# Altium PCB 采集卡.PcbDoc (part 2 of 2)
Units mil, origin at the board's own origin, x right, y up, seen from the top; angles counter-clockwise.
Board outline 5354.33 x 3248.82 mil, 2 copper layers (Top Layer, Bottom Layer); 147 components, 144 nets, 645 pads, 170 vias.
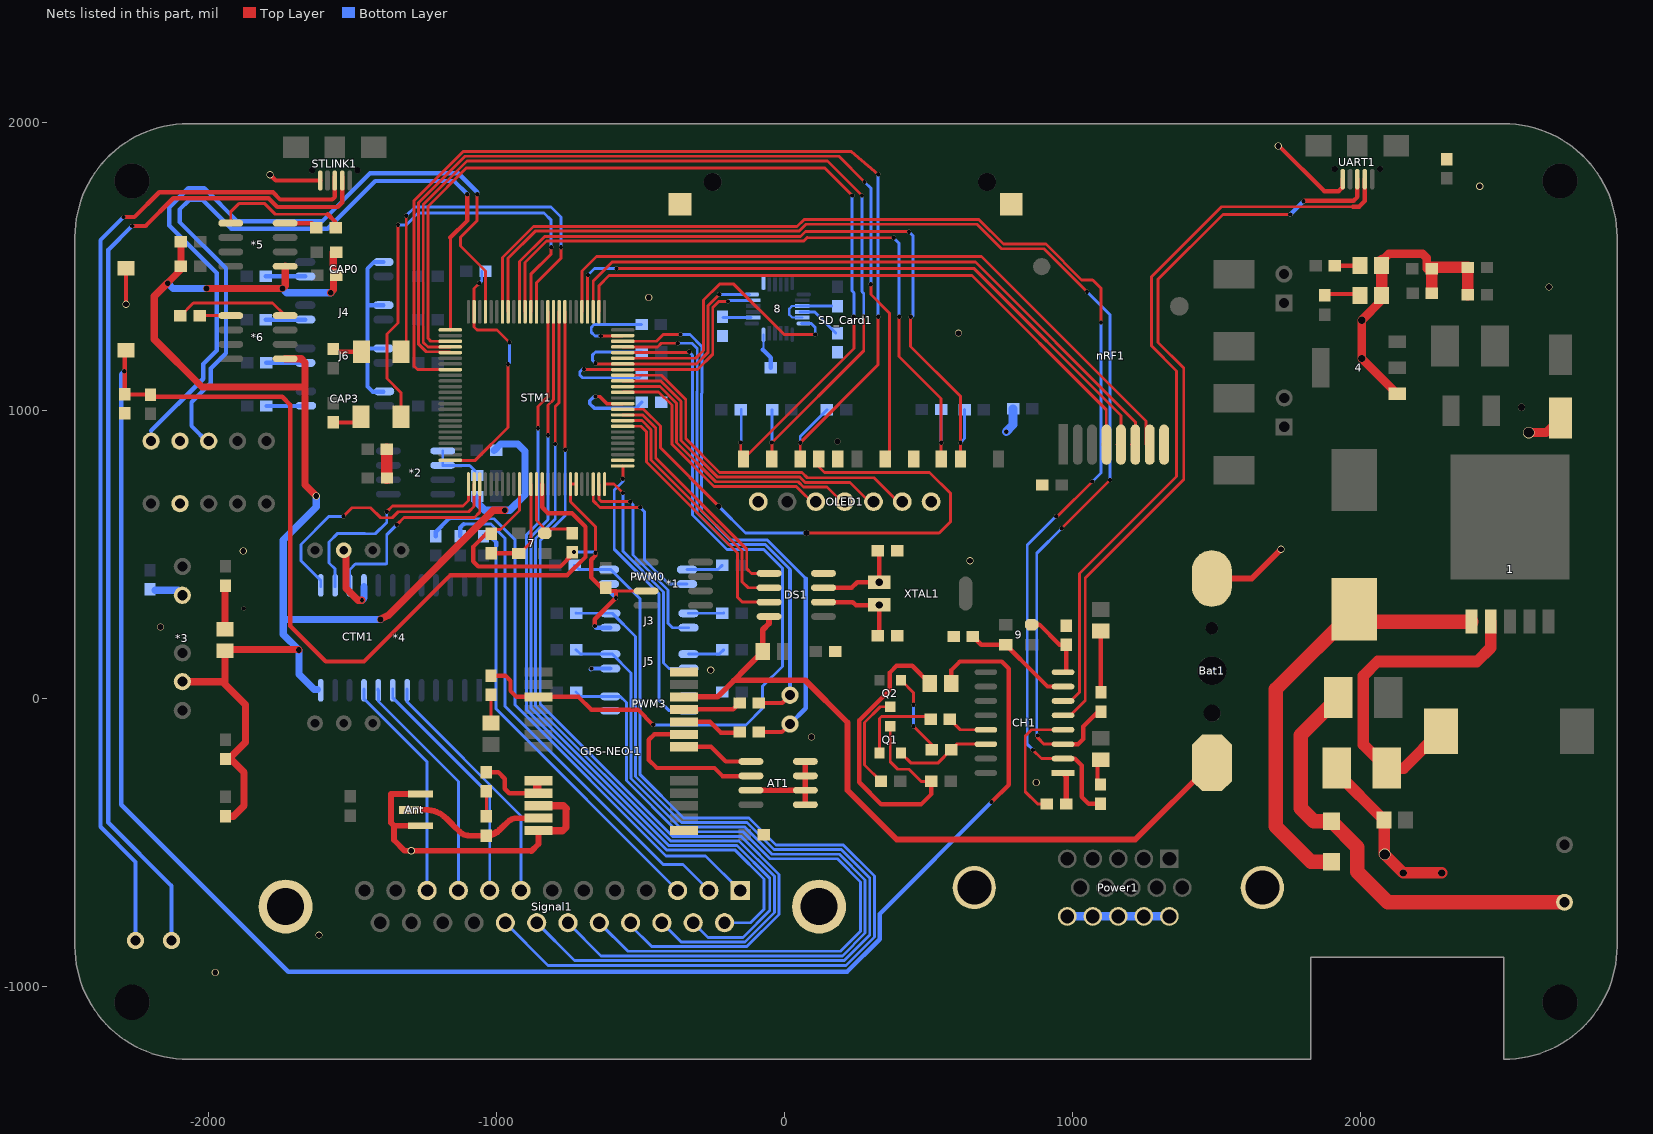
[diagram p2: the nets of this part, all layers, seen from the top]

## Via types
v1: diameter 15, hole 15, Top Layer to Bottom Layer, 109 vias
v2: diameter 20, hole 20, Top Layer to Bottom Layer, 26 vias
v3: diameter 25, hole 20, Top Layer to Bottom Layer, 18 vias
v4: diameter 25, hole 25, Top Layer to Bottom Layer, 14 vias
v5: diameter 40, hole 35, Top Layer to Bottom Layer, 2 vias
v6: diameter 13, hole 13, Top Layer to Bottom Layer, 1 vias

## Nets (pads, with @x,y where several pads share a name; then routed paths per layer and width w, separated by ;. In a path a pad name is that pad's centre, name@x,y a point inside that pad or via, vN(x,y) a via of type N, cw(c..) or ccw(c..) an arc to the next point about the centre after c; other vN are vias at no path point) (continued)
CTR_C: *4.14 STM1.1 | length 787.6
  Top Layer w10: v1(-1380,647) -1360,667 -1115,667 -1096.22,685.78 STM1.1@-1096.22,742.79
  Bottom Layer w10: *4.14@-1559,386.33 *4.14@-1559,391.33 -1559,448 -1580,469 -1580,542 -1550,572 -1457.16,572 -1455.66,570.5 -1419.5,570.5 -1380,610 v1(-1380,647)
CTR_D: *4.13 STM1.2 | length 937.9
  Top Layer w10: v1(-1530,631) -1500,661 -1436,661 -1401,626 -1361,626 -1340,647 -1095,647 -1076.54,665.46 STM1.2@-1076.54,742.79
  Bottom Layer w10: *4.13@-1609,386.33 *4.13@-1609,391.33 -1609,408 -1678,477 -1678,533 -1580,631 v1(-1530,631)
GND: 3.2 3V3.2 4.1 5V.2 8.1 8.9 8.11 8.18 *1.3 *3.2 *4.16 Ant.2 Ant.3 AT1.1 AT1.2 AT1.3 AT1.4 AT1.7 Bat1.2 C1.2 C2.2 C4.2 C5.2 C6.1 C7.2 C8.1 C9.1 C10.1 C11.1 C12.1 C13.2 C14.1 C15.1 C16.1 C17.2 C18.1 C19.1 C20.2 C21.1 C22.2 C23.2 C24.1 C25.2 C26.2 C27.2 C28.2 C30.1 CAP0.3 CAP3.3 CH1.1 CTM1.2 D2.1 DS1.4 GPS-NEO-1.10 GPS-NEO-1.12 GPS-NEO-1.13 GPS-NEO-1.24 J3.3 J4.3 J5.3 J6.3 nRF1.8 OLED1.1 OLED1.7 pad.4 pad.9 Power1.11 Power1.12 Power1.13 Power1.14 Power1.15 Power1.16 Power1.17 PWM0.3 PWM3.3 R9.1 R13.1 R31.1 RST1.1 SD_Card1.3 SD_Card1.6 SD_Card1.12 SD_Card1.13 Signal1.26 Signal1.27 STLINK1.5 STM1.10 STM1.19 STM1.20 STM1.27 STM1.49 STM1.74 STM1.99 UART1.5 | length 9368.5
  Top Layer w10: STM1.99@-1159.21,825.46 -1072.54,825.46 -959,939 v1(-959,1159) ; v1@-1057,1441 -1076.54,1421.46 STM1.74@-1076.54,1341.21 -1076.54,1288.54 -1066,1278 -997,1278 v1(-954,1235) ; C15.1@-1033,570 -1018,585 -985,585 -919.06,650.94 STM1.10@-919.06,742.79 ; C16.1@-746,506 C16.1@-746,521 ; STM1.20@-722.2,742.79 STM1.19@-741.89,742.79 -741.89,681.89 -655,595 v1(-655,505) ; v1(-637,1257) -562.32,1257 STM1.49@-560.79,1258.54 ; -584,372 *1.3@-479.49,372
  Top Layer w15: v3(-2285,1367) RST1.1@-2285,1492 ; C30.1@-1941.97,388.1 C30.1@-1940,390.07 ; v3(-1785,1817) -1765,1797 STLINK1.5@-1611.18,1797 ; C15.1@-1017,570 -1033,570 -1035,570 -1080,525 -1080,475 -1062,457 -777,457 -736,498 C16.1@-736,506 ; v1(-658,250) -658,274 v1(-584,348) -584,372 -608.46,372 C18.1@-620,383.54 ; v1(-655,505) -655,495.3 -670,480.3 -670,418.54 C18.1@-635,383.54 ; v3(1715,1917) 1718,1917 1875,1760 1925,1760 1938.82,1773.82 UART1.5@1938.82,1802
  Top Layer w20: Ant.2@-1262,-443 -1355,-443 ; Ant.3@-1262,-333 -1365,-333 -1365,-433 -1355,-443 ; GPS-NEO-1.12@-853,-460.34 -853,-507 -878,-532 -880,-530 v3(-1295,-530) -1318,-530 -1355,-493 -1355,-443 ; AT1.7@-115.49,-320 AT1.2@73.49,-320 ; AT1.1@73.49,-370 AT1.2@73.49,-320 ; AT1.4@73.49,-220 AT1.3@73.49,-270 AT1.2@73.49,-320 ; CH1.1@968,-260 978.93,-270.93 C20.2@978.93,-368 ; Bat1.2@1485,415 1623,415 v3(1725,517)
  Top Layer w25: R31.1@-1941.97,235.46 C30.1@-1941.97,388.1 ; CTM1.2@-1529,513 -1521,505 -1521,381 -1480,340 v1(-1466,340) ; GPS-NEO-1.12@-853,-460.34 -769.34,-460.34 -758,-449 -758,-386 -756,-384 -766.28,-373.72 GPS-NEO-1.10@-853,-373.72
  Top Layer w30: 3V3.2@2074,1398 2074,1381 v4(2005,1312) v4(2005,1179.32) 4.1@2127.87,1056.45 ; 5V.2@2075,1518.59 2099.41,1543 2216,1543 2231,1528 C12.1@2231,1490 ; v5(2585,922) 2645,922 C4.2@2695,972
  Top Layer w40: R13.1@-1379.07,864 -1379.07,764.07 C19.1@-1379,764 ; D2.1@1918.39,-243 1918.39,-258.79 3.2@2082.6,-423 2082.6,-540.6 v5(2085,-543) v4(2149,-607) v4(2283,-607) ; 3V3.2@2074,1398 5V.2@2074,1502.59 2074,1517.59 5V.2@2075,1518.59 ; C12.1@2248,1490 2248,1406 C13.2@2249,1405 ; C12.1@2248,1495 C11.1@2373.07,1495 C10.1@2373.07,1400
  Bottom Layer w8: -73.96,1209.04 -72,1211 8.18@-72,1261 ; 8.9@55,1361 27,1361 18,1352 18,1331 28,1321 8.11@63,1321
  Bottom Layer w10: v1(-1059,1440) -1050,1449 C24.1@-1050,1482 ; v1(-959,1159) -954,1164 v1(-954,1235) ; v1(-730,507) -657,507 v1(-655,505) ; v1(-637,1257) -656.93,1257 -670,1270.07 -670,1287 -660,1297 C21.1@-495,1297 ; 8.9@55,1361 164.93,1361
  Bottom Layer w15: -1446,1364 J4.3@-1391.25,1364 ; CAP3.3@-1391.25,1064 -1429,1064 -1447,1082 -1447,1214 ; J6.3@-1391.25,1214 -1447,1214 ; CAP0.3@-1391.25,1514 -1424,1514 -1447,1491 -1447,1214 ; v1@-672,100 v1(-669.33,102.67) J5.3@-603.75,102.67 ; v1(-658,250) -652.33,244.33 J3.3@-603.75,244.33 ; PWM0.3@-608.75,396 -608.75,372.75 v1(-584,348) ; -73.96,1209.04 -46.93,1182 C25.2@-46.93,1147
  Bottom Layer w25: C1.2@-2185,374.54 -2102.54,374.54 *3.2@-2085,357 ; v1(-1466,340) -1459,347 *4.16@-1459,386.33
  Bottom Layer w30: v1(771,925) 794.54,948.54 C2.2@794.54,1003.94 ; Power1.15@982.84,-758 Power1.14@1071.42,-758 Power1.13@1160,-758 Power1.12@1248.58,-758 Power1.11@1337.16,-758
  other v1: -1876,311
  other v2: 185.48,891
  other v3: -1975,-953 -1615,-823 875,-293 95,-135 -255,97 -2165,247 645,477 -1878,511 605,1267 -470,1391 2655,1427 2415,1777
  other v4: 2560,1010
INH: *4.15 STM1.3 | length 749.9
  Top Layer w10: v1(-1345,602) -1320,627 -1075,627 -1056.85,645.15 STM1.3@-1056.85,742.79
  Bottom Layer w10: *4.15@-1509,386.33 *4.15@-1509,391.33 -1509,445 -1489,465 -1382,465 -1380,467 -1380,567 v1(-1345,602)
INT: 8.12 STM1.45 | length 1034.1
  Top Layer w10: STM1.45@-560.79,1179.8 -307.2,1179.8 -280,1207 -280,1382 -225,1437 -175,1437 0,1262 100,1262
  Bottom Layer w10: 8.12@60,1301 8.12@86,1301 ; 8.12@73,1301 94,1301 108,1287 v1(108,1262)
IO0: Signal1.17 STM1.58 | length 3216.9
  Top Layer w10: STM1.58@-761.57,1341.21 -761.57,861.35 -760.19,859.96 v1(-760.19,861.81)
  Bottom Layer w10: v1(-760.19,861.81) -760.19,633.93 -847,547.12 -847,-20.49 -387.49,-480 -150.12,-480 -18,-612.12 -18,-751.25 -129.75,-863 -460,-863 -533.25,-789.75 Signal1.17@-533.25,-779.89
IO1: Signal1.16 STM1.59 | length 3062.9
  Top Layer w10: v1(-795,882) -795,1012 -781.26,1025.74 STM1.59@-781.26,1341.21
  Bottom Layer w10: v1(-795,882) -795,621.75 -863,553.75 -863,-27.12 -394.12,-496 -156.75,-496 -34,-618.75 -34,-744.63 -136.37,-847 -357.44,-847 Signal1.16@-424.55,-779.89
IO2: Signal1.15 STM1.60 | length 2919.5
  Top Layer w10: v1(-820,912) -820,1017 -800.94,1036.06 STM1.60@-800.94,1341.21
  Bottom Layer w10: v1(-820,912) -820,619.37 -879,560.37 -879,-33.75 -400.75,-512 -163.37,-512 -50,-625.37 -50,-738 -143,-831 -264.74,-831 Signal1.15@-315.85,-779.89
IO3: Signal1.14 STM1.61 | length 2742.4
  Top Layer w10: v1(-855,937) -855,1012 -820.63,1046.37 STM1.61@-820.63,1341.21
  Bottom Layer w10: v1(-855,937) -855,607 -895,567 -895,-40.37 -407.37,-528 -170,-528 -70,-628 -70,-733 -116.89,-779.89 Signal1.14@-207.15,-779.89
IRQ: nRF1.7 STM1.55 | length 2439.2
  Top Layer w10: STM1.55@-702.52,1341.21 -702.52,1482.48 -652,1533 685,1533 1256,962 nRF1.7@1256,880
LED1: LED1.2 STM1.64 | length 1608
  Top Layer w10: v1(-1341,1643) -1341,1302 -1379,1264 -1379,1109 -1331,1061 LED1.2@-1331,977 ; STM1.64@-879.69,1341.21 -879.69,1471.31 -809,1542 v1(-809,1565)
  Bottom Layer w10: v1(-1341,1643) -1312,1643 -1271,1684 -834,1684 -809,1659 v1(-809,1565)
LED2: LED2.2 STM1.63 | length 1408.4
  Top Layer w10: LED2.2@-1330,1202 -1312,1220 v1(-1312,1675) ; STM1.63@-860,1341.21 -860,1442 -775,1527 v1(-775,1565)
  Bottom Layer w10: v1(-1312,1675) -1282,1705 -810,1705 -775,1670 v1(-775,1565)
MISO: nRF1.6 STM1.53 | length 2330.5
  Top Layer w10: STM1.53@-663.15,1341.21 -663.15,1447.85 -597,1514 664,1514 1219,959 1219,893 nRF1.6@1206,880
MOSI: nRF1.5 STM1.54 | length 2306.1
  Top Layer w10: STM1.54@-682.83,1341.21 -682.83,1467.17 v1(-681,1469) ; v1(-582,1491) -581,1492 658,1492 1169,981 1169,893 nRF1.5@1156,880
  Bottom Layer w10: v1(-681,1469) -659,1491 v1(-582,1491)
Net1_1: 1.1 C3.1 D1.2 | length 1536.9
  Top Layer w50: D1.2@1900,-568 1829,-568 1706,-445 1706,30 1989,313 2036.34,265.66 1.1@2386.14,265.66
Net1_2: 1.2 D2.2 L1.1 | length 1169.3
  Top Layer w40: L1.1@2279.78,-115 2151.78,-243 D2.2@2091.61,-243 2010,-161.39 2010,77 2060,127 2405,127 2453.07,175.07 1.2@2453.07,265.66
Net2_1: 12V.1 D1.1 D3.2 | length 1539.8
  Top Layer w50: D3.2@1923.39,2 1793,-128.39 1793,-383 1838,-428 D1.1@1900,-428 1990,-518 1990,-603 2096,-709 12V.1@2709,-709
Net5_1: 5V.1 R11.1 | length 71.1
  Top Layer w15: R11.1@1911.6,1501.06 5V.1@1982.67,1501.06
Net6_1: 3V3.1 R12.1 | length 109.3
  Top Layer w15: R12.1@1877,1403 1979.2,1403 3V3.1@1984.2,1398
Net7_1: 7.1 C16.2 STM1.13 | length 253.2
  Top Layer w10: STM1.13@-860,742.79 -860,616 -831,587 -746.93,587 C16.2@-746,587.93
Net7_3: 7.3 C15.2 STM1.12 | length 333.4
  Top Layer w10: C15.2@-1007,518.07 C15.2@-1005.93,517 ; 7.3@-903,517 -879.69,540.32 STM1.12@-879.69,742.79
  Top Layer w15: C15.2@-1017,503.07 -922.07,503.07 7.3@-921,502
Net8_10: 8.10 C26.1 | length 154.7
  Bottom Layer w10: 8.10@55,1341 105,1341 C26.1@179,1267
Net8_20: 8.20 C17.1 | length 98
  Bottom Layer w10: C17.1@-213,1321 8.20@-115,1321
Net9_1: 9.1 C27.1 CH1.8 | length 244
  Top Layer w15: 9.1@859,255 886,255 956,185 C27.1@979,185 CH1.8@979,90
Net9_3: 9.3 C23.1 CH1.7 | length 385.1
  Top Layer w15: C23.1@655,214 684,185 9.3@769,185 874,80 914,40 CH1.7@968,40
Net*2_1: *2.1 *2.2 R29.1 | length 170.4
  Bottom Layer w10: *2.1@-1185.51,858 *2.2@-1185.51,808 -1092,808 R29.1@-1073,789
Net*5_1: *5.1 R40.1 | length 445.1
  Top Layer w10: *5.1@-1921.49,1649 -1921.49,1688.51 -1893.5,1716.5 -1803.5,1716.5 -1767,1680 -1585,1680
  Top Layer w15: -1585,1680 -1557.54,1652.54 R40.1@-1557.54,1649
Net*5_8: *5.8 R40.2 | length 114.7
  Top Layer w15: *5.8@-1732.51,1649 -1640.46,1649 R40.2@-1624.46,1633
Net*6_1: *6.1 R52.1 | length 107
  Top Layer w10: R52.1@-2028.54,1328 *6.1@-1921.49,1328
Net*6_8: *6.8 R52.2 | length 400.8
  Top Layer w10: R52.2@-2096.46,1327 -2051.46,1372 -1776.51,1372 *6.8@-1732.51,1328
NetAntenna1_1: Ant.1 GPS-NEO-1.11 L2.2 | length 776.2
  Top Layer w10: L2.2@-1049,-477.75 ccw(c-1043.69,-377.89) L2.2@-1043.69,-477.89
  Top Layer w15: -1177.71,-417.29 -1146.4,-448.6 ccw(c-1075.69,-377.89) -1127.61,-463.36 ; L2.2@-1049,-477.75 ccw(c-1054.31,-377.89) -983.6,-448.6 -981.32,-446.32 cw(c-910.61,-517.03) -958.71,-429.36 cw(c-910.61,-517.03) -910.61,-417.03 GPS-NEO-1.11@-873,-417.03
  Top Layer w20: Ant.1@-1302,-388 -1244.39,-388 cw(c-1244.39,-488) -1173.68,-417.29 -1127.61,-463.36 ccw(c-1092.52,-428.26) -1092.52,-477.89 L2.2@-1034,-477.89 ; L2.2@-1043.69,-477.89 L2.2@-1034,-477.89 ; GPS-NEO-1.11@-853,-417.03 -910.61,-417.03 -928.95,-417.03 ccw(c-928.95,-459.12) -958.71,-429.36 -988.32,-458.97 cw(c-1034,-413.29) L2.2@-1034,-477.89
NetAT1_5: AT1.5 GPS-NEO-1.18 | length 280.7
  Top Layer w10: GPS-NEO-1.18@-378,-169 GPS-NEO-1.18@-373,-174
  Top Layer w15: GPS-NEO-1.18@-368,-169 -254,-169 -230,-193 -203,-220 AT1.5@-115.49,-220
NetAT1_6: AT1.6 GPS-NEO-1.19 | length 558.1
  Top Layer w15: GPS-NEO-1.19@-368,-125.69 -450.69,-125.69 -470,-145 -470,-215 -442,-243 -242,-243 -214,-271 -116.49,-271 AT1.6@-115.49,-270
NetC6_2: C6.2 DS1.2 XTAL1.1 | length 307.4
  Top Layer w15: DS1.2@136.49,333 238,333 249,322 328.37,322 XTAL1.1@330,323.63 330,221.93 C6.2@325.07,217
NetC14_2: C14.2 DS1.3 XTAL1.2 | length 312.2
  Top Layer w15: DS1.3@136.49,383 234,383 253.37,402.37 XTAL1.2@330,402.37 330,506.07 C14.2@325.07,511
NetC20_1: C20.1 CH1.4 | length 425.9
  Top Layer w10: C20.1@912,-368 880,-368 837,-325 837,-132 859,-110 CH1.4@968,-110
NetCH1_13: CH1.13 R20.2 | length 140.3
  Top Layer w10: R20.2@574.93,-74 610.93,-110 CH1.13@700.28,-110
NetCH1_14: CH1.14 Q1.2 R21.2 | length 337
  Top Layer w10: Q1.2@405.4,-190.26 441.14,-226 532.93,-226 R21.2@579.93,-179 598.93,-160 CH1.14@700.28,-160
NetD5_2: D5.2 Q1.3 R15.2 | length 1385.2
  Top Layer w10: 263,-78.37 367,25.63 367,29.16 ; Q1.3@368,-97.74 368,-221 394,-247 433,-247 475,-289 R15.2@511.07,-289
  Top Layer w15: D5.2@505.6,51 444.6,112 390,112 367,89 367,29.16 260.5,-77.34 260.5,-292.5 337,-369 475,-369 511.07,-332.93 R15.2@511.07,-289
NetGPS-NEO-1_8: GPS-NEO-1.8 GPS-NEO-1.9 R18.2 | length 270.2
  Top Layer w15: R18.2@-1034,-257.07 -992.93,-257.07 -970,-280 -970,-315 -954.58,-330.42 -873,-330.42 GPS-NEO-1.9@-858,-330.42
  Top Layer w30: GPS-NEO-1.9@-858,-330.42 GPS-NEO-1.8@-858,-287.11
NetGPS-NEO-1_20: GPS-NEO-1.20 R22.1 | length 239.4
  Top Layer w10: GPS-NEO-1.20@-378,-82.39 GPS-NEO-1.20@-368,-82.39
  Top Layer w15: GPS-NEO-1.20@-368,-82.39 -257.61,-82.39 -220,-120 -157,-120 R22.1@-155,-118
NetGPS-NEO-1_21: GPS-NEO-1.21 R23.1 | length 212.1
  Top Layer w10: GPS-NEO-1.21@-378,-39.08 GPS-NEO-1.21@-368,-39.08
  Top Layer w15: GPS-NEO-1.21@-348,-39.08 -177.08,-39.08 R23.1@-155,-17
NetJ1_1: PWM0.1 R33.2 | length 128.6
  Bottom Layer w10: PWM0.1@-337.25,446 -230.28,446 R33.2@-215,461.28
NetJ2_1: CAP0.1 R34.2 | length 136.8
  Bottom Layer w15: R34.2@-1799.54,1464 CAP0.1@-1662.75,1464
NetJ3_1: J3.1 R37.2 | length 122.5
  Bottom Layer w10: J3.1@-332.25,294.33 -210.67,294.33 R37.2@-210,295
NetJ4_1: J4.1 R38.2 | length 136.8
  Bottom Layer w15: R38.2@-1799.54,1314 J4.1@-1662.75,1314
NetJ5_1: J5.1 R42.2 | length 128.6
  Bottom Layer w10: J5.1@-332.25,152.67 -225.28,152.67 R42.2@-210,167.94
NetJ6_1: J6.1 R43.2 | length 135.3
  Bottom Layer w15: R43.2@-1798.07,1164 J6.1@-1662.75,1164
NetJ7_1: PWM3.1 R49.2 | length 128.6
  Bottom Layer w10: PWM3.1@-332.25,6 -225.28,6 R49.2@-210,21.28
NetJ8_1: CAP3.1 R50.2 | length 137.2
  Bottom Layer w15: R50.2@-1797.54,1014 -1661.75,1014 CAP3.1@-1660.75,1015
NetL2_1: L2.1 R18.1 | length 87
  Top Layer w10: L2.1@-1034,-410.96 R18.1@-1034,-324
NetLED1_1: LED1.1 R26.1 | length 93.3
  Top Layer w15: R26.1@-1553.8,957 -1488.8,957 LED1.1@-1468.8,977
NetLED2_1: LED2.1 R27.1 | length 86
  Top Layer w15: R27.1@-1553.8,1202 LED2.1@-1467.8,1202
NetPCC1_2: PCC1.2 R24.1 | length 97.6
  Top Layer w10: PCC1.2@-1018,-86.6 R24.1@-1018,11
NetQ1_1: Q1.1 R20.1 | length 303.5
  Top Layer w10: Q1.1@330.6,-190.26 330.6,-71.4 338,-64 498,-64 R20.1@508,-74
NetQ2_1: Q2.1 R21.1 | length 285.8
  Top Layer w10: Q2.1@405.4,62.26 449,18.66 v1(449,-23) ; v1(449,-98) 513,-162 R21.1@513,-179
  Bottom Layer w10: v1(449,-98) v1(449,-23)
NetQ2_3: Q2.3 R25.2 | length 339.3
  Top Layer w10: R25.2@336.07,-289 279,-231.93 279,-85 333.74,-30.26 Q2.3@368,-30.26
NetR9_2: R9.2 STM1.37 | length 336
  Top Layer w12: v1(-655,1047) -640,1047 -615.31,1022.31 STM1.37@-560.79,1022.31
  Bottom Layer w12: v1(-655,1047) -660,1047 -675,1032 -675,1022 -660,1007 -514.15,1007 R9.2@-494.15,1027
NetR14_2: R14.2 RX1.2 | length 92.4
  Top Layer w10: R14.2@1088,-300 R14.2@1089.53,-298.47
  Top Layer w15: R14.2@1088,-300 1088,-225.33 RX1.2@1099,-214.33
NetR16_2: R16.2 TX1.2 | length 216.3
  Top Layer w15: R16.2@1090,20 1099,29 TX1.2@1099,232.6
NetR45_1: R45.1 Signal1.3 | length 1523.5
  Bottom Layer w10: -1000,530 -1000,-38.28 Signal1.3@-370.2,-668.08
  Bottom Layer w15: R45.1@-1044,562 -1021,562 -999,540 -1000,539 -1000,530
NetR46_1: R46.1 Signal1.2 | length 1767.5
  Bottom Layer w10: -1113,604 -1018,604 -970,556 -970,-28 -420,-578 -351.57,-578 Signal1.2@-261.5,-668.08
  Bottom Layer w15: R46.1@-1125,562 -1125,592 -1113,604
NetR47_1: R47.1 Signal1.1 | length 1961.3
  Bottom Layer w10: -1165,622 -1164.5,622.5 -1007.5,622.5 -935,550 -935,-23 -410,-548 -272.87,-548 Signal1.1@-152.8,-668.08
  Bottom Layer w15: R47.1@-1210,562 -1210,577 -1165,622
OLED_D0: OLED1.3 STM1.39 | length 913.2
  Top Layer w10: STM1.39@-559.47,1063 -436,1063 -390,1017 -390,881 -244,735 42,735 OLED1.3@110,667
OLED_D1: OLED1.4 STM1.40 | length 1020
  Top Layer w10: STM1.40@-560.79,1081.37 -431.74,1081.37 -374,1023.63 -374,887.63 -237.37,751 48.63,751 66.63,733 149,733 OLED1.4@210,672
OLED_DS: OLED1.6 STM1.42 | length 1238.4
  Top Layer w10: STM1.42@-560.79,1120.74 -425.86,1120.74 -342,1036.88 -342,900.88 -224.12,783 61.88,783 79.88,765 312,765 OLED1.6@410,667
OLED_RST: OLED1.5 STM1.41 | length 1130.2
  Top Layer w10: STM1.41@-560.79,1101.06 -428.8,1101.06 -358,1030.25 -358,894.25 -230.75,767 55.25,767 73.25,749 228,749 OLED1.5@310,667
PCCGPS: GPS-NEO-1.3 R24.2 STM1.46 | length 2765.5
  Top Layer w10: STM1.46@-560.79,1199.48 -332.52,1199.48 v1(-330,1202)
  Top Layer w15: R24.2@-1018,77.93 -967.93,77.93 -950,60 -950,25 -929.23,4.23 GPS-NEO-1.3@-853,4.23 -714.23,4.23 -670,-40 -508,-40 v1(-455,-93)
  Bottom Layer w10: v1(-455,-93) -133,-93 -75,-35 -75,41 -6,110 -6,451 -71,516 -199,516 -318.75,635.75 -318.75,1071.2 -318,1071.95 -318,1190 v1(-330,1202)
PWM0: PWM0.2 STM1.23 | length 601.2
  Top Layer w10: STM1.23@-663.15,742.79 -663.15,685.15 -640,662 v1(-500,662)
  Bottom Layer w10: v1(-500,662) -485,647 -485,479.88 -401.12,396 PWM0.2@-337.25,396
PWM1: J3.2 STM1.24 | length 718.2
  Top Layer w10: STM1.24@-643.46,742.79 -643.46,690.46 -635,682 v1(-535,682)
  Bottom Layer w10: v1(-535,682) -525,672 -525,497.25 -403,375.25 -403,260 -387.33,244.33 J3.2@-332.25,244.33
PWM2: J5.2 STM1.25 | length 819.7
  Top Layer w10: STM1.25@-623.78,742.79 -590.79,742.79 v1(-560,712)
  Bottom Layer w10: v1(-560,712) -560,509.63 -419,368.63 -419,122 -399.67,102.67 J5.2@-332.25,102.67
PWM3: PWM3.2 STM1.26 | length 1008.4
  Top Layer w10: STM1.26@-560.79,805.78 -560,804.99 v1(-560,762)
  Bottom Layer w10: v1(-560,762) -560,752 -590,722 -590,517 -435,362 -435,-8 -399,-44 PWM3.2@-332.25,-44
PWM_O0: PWM0.4 R32.2 Signal1.21 | length 3439.5
  Bottom Layer w10: Signal1.21@-968.05,-779.89 -819.94,-928 214.35,-928 313,-829.35 313,-618.12 204.88,-510 -28.37,-510 -122.37,-416 -350.12,-416 -500,-266.12 -500,343.95 -602.05,446 PWM0.4@-608.75,446 -712.26,446 R32.2@-727.54,461.28
PWM_O1: J3.4 R36.2 Signal1.20 | length 3130.4
  Bottom Layer w10: Signal1.20@-859.35,-779.89 -728.24,-911 208.72,-911 297,-822.72 297,-624.75 198.25,-526 -35,-526 -129,-432 -356.75,-432 -516,-272.75 -516,213.28 -597.05,294.33 J3.4@-603.75,294.33 -721.87,294.33 R36.2@-722.54,295
PWM_O2: J5.4 R41.2 Signal1.19 | length 2846.3
  Bottom Layer w10: Signal1.19@-750.65,-779.89 -635.54,-895 202.09,-895 281,-816.09 281,-631.37 191.63,-542 -42.86,-542 -136.86,-448 -363.37,-448 -532,-279.37 -532,87.62 -597.05,152.67 J5.4@-603.75,152.67 -707.26,152.67 R41.2@-722.54,167.94
PWM_O3: PWM3.4 R48.2 Signal1.18 | length 2567.6
  Bottom Layer w10: R48.2@-722.54,21.28 -707.26,6 PWM3.4@-603.75,6 -569,6 -548,-15 -548,-286 -370,-464 -143.49,-464 -49.49,-558 185,-558 265,-638 265,-809.46 195.46,-879 -542.84,-879 Signal1.18@-641.95,-779.89
RST: C5.1 D5.1 R1.2 RST1.2 STM1.14 | length 8925.6
  Top Layer w15: RST1.2@-2285,1207 -2290,1202 C5.1@-2290,1055.46 -2288.46,1053.93 R1.2@-2200,1053.93 -2192.07,1046 -1743,1046 -1715,1018 -1715,250 -1592,127 -1459,127 -1159,427 -753,427 -690,490 -690,595 -737,642 -820,642 -840.31,662.32 STM1.14@-840.31,742.79 ; D5.1@580.4,51 580.4,97.4 610,127 755,127 780,102 780,-301 v1(720,-361)
  Bottom Layer w15: v1(-2291,1135) -2302,1124 -2302,-370 -1722,-950 218.51,-950 331.5,-837.01 331.5,-749.5 v1(720,-361)
RTC_CLK: DS1.7 STM1.33 | length 912.8
  Top Layer w10: STM1.33@-560.79,943.57 -496.83,943.57 -478,924.75 -478,819.75 -162,503.75 -162,350 -145,333 DS1.7@-52.49,333
RTC_IO: DS1.6 STM1.34 | length 872.5
  Top Layer w10: STM1.34@-560.79,963.26 -493.89,963.26 -462,931.37 -462,826.37 -146,510.37 -146,404 -125,383 DS1.6@-52.49,383
RTC_RST: DS1.5 STM1.35 | length 838.4
  Top Layer w10: STM1.35@-560.79,982.94 -490.94,982.94 -446,938 -446,833 -130,517 -130,449 -114,433 DS1.5@-52.49,433 ; DS1.5@-52.49,432 DS1.5@-51.49,432
RX1: CH1.2 R14.1 STM1.69 | length 4505.7
  Top Layer w10: STM1.69@-978.11,1341.21 -978.11,1529.77 -870.88,1637 44.75,1637 68.75,1661 676.25,1661 761.25,1576 908.63,1576 1032.63,1452 1071,1452 1100,1423 v1(1100,1304) ; v1(863,-180) 893,-210 CH1.2@968,-210 ; v1(944,631) 949,631 v1(1070,752)
  Top Layer w15: CH1.2@968,-210 1009,-210 1033,-234 1033,-343 1056.93,-366.93 R14.1@1088,-366.93
  Bottom Layer w10: v1(863,-180) 863,-179 844,-160 844,531 v1(944,631) ; v1(1070,752) 1100,782 v1(1100,1304)
RX3GPS: pad.1@20,-90 R22.2 STM1.48 | length 1996.2
  Top Layer w10: STM1.48@-560.79,1238.85 -443.15,1238.85 -420,1262 v1(-360,1262)
  Top Layer w15: R22.2@-88.07,-118 -8,-118 pad.1@20,-90
  Bottom Layer w10: v1(-360,1262) -327.37,1262 -286,1220.63 -286,1058.7 -286.75,1057.95 -286.75,649 -187.25,549.5 -59.25,549.5 75,415.25 ; pad.1@0,-90 8,-90 pad.1@14,-84
  Bottom Layer w15: pad.1@20,-90 75,-35 75,415.25
SCK: nRF1.4 STM1.52 | length 2185.5
  Top Layer w10: STM1.52@-643.46,1341.21 -643.46,1431.54 -608,1467 652,1467 1118,1001 1118,892 nRF1.4@1106,880
SCL: 8.23 R17.2 STM1.43 | length 1028.8
  Top Layer w10: v1(-695,1142) -693.43,1140.43 STM1.43@-560.79,1140.43 -301.32,1140.43 -248,1193.75 -248,1356.37 -227.37,1377 v1(-195,1377)
  Bottom Layer w10: v1(-695,1142) -700,1142 -710,1132 -710,1122 -700,1112 -504.15,1112 R17.2@-494.15,1122 ; v1(-195,1377) -191,1381 8.23@-115,1381
SD_CD: SD_Card1.10 STM1.36 | length 1997.9
  Top Layer w10: STM1.36@-560.79,1002.63 -488,1002.63 -430,944.63 -430,869 v2(-227,666) ; v2(77,573) 538,573 578,613 578,710 505,783 140,783 120.52,802.48 SD_Card1.10@120.52,830
  Bottom Layer w10: v2(-227,666) -134,573 v2(77,573)
SD_CLK: SD_Card1.5 STM1.80 | length 3268.4
  Top Layer w10: STM1.80@-1159.21,1199.48 -1161.99,1202.26 -1242.89,1202.26 -1269,1228.37 -1269,1720.25 -1108.25,1881 190,1881 v1(279,1792) ; v1(301,1437) 301,1401 365,1337 365,843.77 SD_Card1.5@351.23,830
  Bottom Layer w10: v1(279,1792) 301,1770 v1(301,1437)
SD_CMD: R5.2 SD_Card1.2 STM1.83 | length 3669.1
  Top Layer w10: STM1.83@-1159.21,1140.43 -1273.43,1140.43 -1285,1152 -1285,1726.88 -1114.88,1897 233,1897 v1(326,1819) ; SD_Card1.2@55.56,830 v1(55.56,886.56) 326,1157 v1(326,1324)
  Bottom Layer w10: v1(55.56,886.56) 55.56,908.49 R5.2@148.07,1001 ; v1(326,1324) v1(326,1819)
SD_D0: R6.2 SD_Card1.7 STM1.65 | length 2438.7
  Top Layer w10: STM1.65@-899.37,1341.21 -899.37,1512.63 -825,1587 68,1587 80,1599 81,1598 v1(380,1598) ; v1(399,1324) 399,1186 544.93,1040.07 v1(544.93,886.56) SD_Card1.7@544.93,830
  Bottom Layer w10: v1(380,1598) 399,1579 v1(399,1324) ; v1(544.93,886.56) R6.2@544.93,1002
SD_D1: R7.2 SD_Card1.8 STM1.66 | length 2565.2
  Top Layer w10: STM1.66@-919.06,1341.21 -919.06,1515.57 -831.63,1603 57,1603 74,1620 v1@433,1620 ; v1(439,1324) 439,1221 611.86,1048.14 v1(611.86,886.56) SD_Card1.8@611.86,830
  Bottom Layer w10: v1(433,1619) 447,1605 447,1327 v1@439,1319 ; v1(611.86,886.56) 626.07,900.77 R7.2@626.07,1001.5
SD_D2: R3.2 SD_Card1.9 STM1.78 | length 3353.7
  Top Layer w10: STM1.78@-1159.21,1238.85 -1226.85,1238.85 -1237,1249 -1237,1707 -1104,1840 141,1840 v1(236,1745) ; v1(-151,887.13) -151,839.71 SD_Card1.9@-141.29,830 242,1213.29 v1(242,1325)
  Bottom Layer w10: v1@-149.07,887.13 R3.2@-149.07,1002 ; v1@236,1739 236,1413 242,1407 v1(242,1325)
SD_D3: R4.2 SD_Card1.1 STM1.79 | length 3376.9
  Top Layer w10: STM1.79@-1159.21,1219.17 -1237.17,1219.17 -1253,1235 -1253,1713.63 -1101.63,1865 150,1865 v1(270,1745) ; SD_Card1.1@-42.87,830 v1(-42.87,887.13) 276,1206 v1(276,1325)
  Bottom Layer w10: v1@-41.93,888.07 R4.2@-41.93,1001 ; v1(270,1745) 270,1411 276,1405 v1(276,1325)
SDA: 8.24 R19.2 STM1.44 | length 940.8
  Top Layer w10: v1(-655,1162) -653.11,1160.11 STM1.44@-560.79,1160.11 -304.26,1160.11 -264,1200.37 -264,1363 v1(-225,1402)
  Bottom Layer w10: v1(-655,1162) -665,1172 -665,1192 -655,1202 R19.2@-494.15,1202 ; v1(-225,1402) -224,1401 8.24@-120,1401
SGND: *3.5 *4.12 *5.5 *6.5 C29.1 C31.2 C32.1 C33.1 C34.1 C35.1 R28.2 R30.1 R31.2 | length 5615.6
  Top Layer w25: C34.1@-2094.46,1574 C35.1@-2094.46,1499 -2094.46,1487.54 -2187,1395 -2187,1246 -2021,1080 -1666,1080 ; *3.5@-2089.57,57 -1950,57 -1941.97,48.97 ; v2(-2006,1422) v2(-1742,1422) -1732.51,1431.49 *5.5@-1732.51,1499 ; C31.2@-1940,-409.93 -1911.93,-409.93 -1875,-373 -1875,-258 -1925,-208 -1870,-153 -1870,-23 -1941.97,48.97 ; *6.5@-1732.51,1178 -1677,1178 -1664,1165 -1664,741 v3(-1625,702) ; v2(-1685,167) -1686.54,168.54 -1941.97,168.54 R31.2@-1941.97,164.6 -1941.97,48.97 ; v2(-1574,1407) -1564.54,1416.46 -1564.54,1499 ; -1565.54,1500 C33.1@-1565.54,1548 ; v2(-1402,273) -1375,287 -1010,652 v2(-970,652)
  Bottom Layer w25: v2(-2140,1440) -2122,1422 v2(-2006,1422) ; v2(-1742,1422) -1727,1407 v2(-1574,1407) ; -1736,273 v2(-1402,273) ; v3(-1625,702) -1625,663 -1739,549 -1739,221 v2(-1685,167) -1685,83 -1632,30 -1620,30 ; R28.2@-1073,700 -1073,685 -1040,652 v2(-970,652) -953,652 -900,705 -900,857 -925,882 -985.07,882 R30.1@-1007.07,860
SWCLK: pad.3 STM1.76 | length 2597.5
  Top Layer w10: STM1.76@-1159.21,1278.22 -1159.21,1598.79
  Top Layer w15: -1159.21,1598.79 -1100,1658 v1(-1100,1749)
  Bottom Layer w15: pad.3@-1998,877 -1998,885 -2058,945 -2058,1027 -1991,1094 -1991,1144 -1938,1197 -1938,1492 -2099,1653 -2099,1696 -2065,1730 -2020,1730 -1920,1630 -1585,1630 -1420,1795 -1146,1795 v1(-1100,1749)
SWDIO: pad.5 STM1.72 | length 2705.1
  Top Layer w10: v1(-1066,1749) -1066,1658 -1124,1600 -1124,1570 -1037.17,1483.17 STM1.72@-1037.17,1341.21
  Bottom Layer w10: pad.5@-2198,877 -2198,928 ; v1(-1066,1749) v1@-1066,1756
  Bottom Layer w15: -2198,928 -2017,1109 -2017,1160 -1970,1207 -1970,1476 -2135,1641 -2135,1704 -2069,1770 -2013,1770 -1898,1655 -1605,1655 -1438,1822 -1132,1822 v1@-1066,1756
TX1: CH1.3 R16.1 STM1.68 | length 4319.4
  Top Layer w10: STM1.68@-958.43,1341.21 -958.43,1526.83 -864.25,1621 51.37,1621 75.37,1645 669.63,1645 754.63,1560 902,1560 v1(1051,1411) ; v1(880,-130) 880,-138 902,-160 CH1.3@968,-160 ; v1(964,590) v1(1131,757)
  Top Layer w15: CH1.3@968,-160 1020,-160 1038,-142 1038,-98.93 R16.1@1090,-46.93
  Bottom Layer w10: v1@877,-130 877,503 v1(964,590) ; v1(1051,1411) 1131,1331 v1(1131,757)
TX3GPS: pad.0 R23.2 STM1.47 | length 1796.9
  Top Layer w10: STM1.47@-560.79,1219.17 -440,1219.17 -427.17,1232 v1(-370,1232)
  Top Layer w15: R23.2@-88.07,-17 -7,-17 pad.0@20,10
  Bottom Layer w10: v1(-370,1232) -320,1232 -302,1214 -302,1065.33 -302.75,1064.58 -302.75,642.38 -193.87,533.5 -65.87,533.5 17.63,450
  Bottom Layer w15: pad.0@20,10 20,444.09
U+: pad.6@-2252,-842 STLINK1.3 | length 3451.4
  Top Layer w15: v1(-2294,1670) -2256,1670 -2170,1756 -1775,1756 -1750,1731 -1569,1731 -1560,1740 STLINK1.3@-1560,1797 STLINK1.3@-1560,1812
  Bottom Layer w15: v1(-2294,1670) -2374,1590 -2374,-447 -2252,-569 pad.6@-2252,-842
U-: pad.7@-2127,-842 STLINK1.2 | length 3486.2
  Top Layer w15: v1(-2264,1639) -2217,1639 -2121,1735 -1790,1735 -1760,1705 -1550,1705 -1534.41,1720.59 STLINK1.2@-1534.41,1797 STLINK1.2@-1534.41,1812
  Bottom Layer w15: v1(-2264,1639) -2347,1556 -2347,-432 -2127,-652 pad.7@-2127,-842
UD+: CH1.5 UART1.3 | length 2601.5
  Top Layer w10: CH1.5@993,-60 1045,-8 1045,417.37 1387,759.37 1387,1145.63 1298,1234.63 1298,1454 1523,1679 v1(1757,1679) ; UART1.3@1990,1802 UART1.3@1990,1817
  Top Layer w15: v1(1803,1725) 1805,1727 1977,1727 1990,1740 UART1.3@1990,1802
  Bottom Layer w15: v1(1757,1679) v1(1803,1725)
UD-: CH1.6 UART1.2 | length 2601.8
  Top Layer w10: CH1.6@995,-10 1025,20 1025,432 1362,769 1362,1136 1275,1223 1275,1463 1518,1706 1975,1706 ; UART1.2@2015.59,1802 UART1.2@2015.59,1817
  Top Layer w15: 1975,1706 1996,1706 2015.59,1725.59 UART1.2@2015.59,1802
V_BAT: Bat1.1 D4.2 DS1.8 GPS-NEO-1.22 | length 2631.7
  Top Layer w20: GPS-NEO-1.22@-378,4.23 -231.7,4.23 D4.2@-74.4,161.53 ; -173.93,62 73,62 220,-85 220,-320 391,-491 1219,-491 Bat1.1@1485,-225 ; D4.2@-74.4,165 -74.4,237.09 -52.49,259 DS1.8@-52.49,283
右前: *4.6 Signal1.8 | length 864.2
  Bottom Layer w10: *4.6@-1310,32 -1310,-13 -913.7,-409.3 Signal1.8@-913.7,-668.08
右后: *4.7 Signal1.9 | length 839.5
  Bottom Layer w10: *4.7@-1359,32 -1359,1 -1022.4,-335.6 Signal1.9@-1022.4,-668.08
左前: *4.9 Signal1.11 | length 792
  Bottom Layer w10: *4.9@-1459,32 *4.9@-1459,27 -1459,-4 -1457,-4 -1239.8,-221.2 Signal1.11@-1239.8,-668.08
左后: *4.8 Signal1.10 | length 815.2
  Bottom Layer w10: *4.8@-1410,27 *4.8@-1410,32 ; *4.8@-1409,27 -1409,-12 -1131.1,-289.9 Signal1.10@-1131.1,-668.08
pads on no net: 1.6 4.4 7.2 7.4 8.2 8.3 8.4 8.5 8.6 8.7 8.14 8.15 8.16 8.17 8.19 8.21 8.22 9.2 9.4 *1.4 *1.5 *1.6 *1.7 *1.8 *2.5 *2.6 *2.7 Bat1.0 CH1.9 CH1.10 CH1.11 CH1.12 CH1.15 CTM1.8 GPS-NEO-1.1 GPS-NEO-1.2 GPS-NEO-1.4 GPS-NEO-1.5 GPS-NEO-1.6 GPS-NEO-1.14 GPS-NEO-1.15 GPS-NEO-1.16 GPS-NEO-1.17 nRF1.10 nRF1.11 SD_Card1. SD_Card1.11 STLINK1. STLINK1.4 STLINK1.6 STLINK1.7 STLINK1.8 STM1.4 STM1.5 STM1.7 STM1.8 STM1.9 STM1.15 STM1.16 STM1.17 STM1.18 STM1.30 STM1.31 STM1.32 STM1.38 STM1.51 STM1.62 STM1.67 STM1.73 STM1.77 STM1.81 STM1.82 STM1.84 STM1.85 STM1.86 STM1.87 STM1.88 STM1.89 STM1.90 STM1.91 UART1. UART1.4 UART1.6 UART1.7 UART1.8 XTAL1.3

## Polygon pours and split planes (outlines as drawn)
GND on Top Layer "Top Layer-No Net" (solid, remove dead copper, pour order 10): -3132,1777.65 -2970.63,1939.01 -2716.77,2113.15 -2345,2266.65 -2280.77,2266.65 2699,2233.65 2782,2233.65 3246,1769.65 3246,1624.15 3147,-1270.35 3095.37,-1321.99 2650,-1676.35 2460.23,-1676.35 -3066,-1551.35
GND on Bottom Layer "Top Layer-No Net" (solid, remove dead copper, pour order 12): -2954.16,1716.31 -2954.16,1791.31 -2879.63,2387.31 -2242.16,2387.31 2802.84,2387.31 3183.84,2351.03 3183.84,1857.31 3183.84,1559.03 3183.84,-985.97 3183.84,-1505.69 2015.84,-1505.69 1427.84,-1505.69 -585.16,-1505.69 -2879.63,-1536.97

## Keep-outs
Keep-Out Layer:
  lines w10: -2462.61,-860.95 ccw(c-2068.91,-860.95) -2068.91,-1254.65 1828.73,-1254.65 1828.73,-900.32 2163.38,-900.32 2498.02,-900.32 2498.02,-1254.65 ccw(c2498.02,-860.95) 2891.72,-860.95 2891.72,1600.47 ccw(c2498.02,1600.47) 2498.02,1994.17 -2068.91,1994.17 ccw(c-2068.91,1600.47) -2462.61,1600.47 -2462.61,-860.95

## Other copper
Top Layer:
  pour cut-out: -834,130 -364,130 -357,123 -357,-499 -844,-499 -847,-502
  pour cut-out: -1349.6,-300 -1171.78,-300 -1141.36,-330.42 -840.78,-330.42 -840.78,-516 -842.78,-518 -1355.22,-518
Bottom Layer:
  text "2016.07.13" at 2496,-773 h80

## Silkscreen, mask and mechanical layers (free items; w line width, h text height)
Top Overlay:
  lines w10: -2462.61,369.76 -2328,370 ; -1990.17,-1254.65 -1990,-1143 ; -1685.44,1416 -1685.44,1476.26 -1623,1476.26 ; -888,1904 -887.81,1994.17 ; 214.56,-1254.65 214.56,-1153 ; 1316.92,1923 1316.92,1994.17 ; 2060,-736.73 2114.56,-736.73 2114.56,-678 ; -1854.34,-1333.39 236.21,-1333.39 236.21,-758.58 -1854.34,-758.58 -1854.34,-1333.39 ; -1720.48,1809.13 -1720.48,2005.98 -1405.52,2005.98 -1405.52,1809.13 -1720.48,1809.13 ; -344.5,911.5 773.61,911.5 773.61,2053.23 -344.5,2053.23 -344.5,911.5 ; 553.14,-1333.39 1765.74,-1333.39 1765.74,-758.58 553.14,-758.58 553.14,-1333.39 ; 1834.64,1809.13 2149.6,1809.13 2149.6,2005.98 1834.64,2005.98 1834.64,1809.13
  text "TX3" at 70,-10 h70
  text "RX3" at 60,-110 h70
Bottom Overlay:
  lines w10: -2313,-559 -2313,953.46 -1675,953.46 -1675,-553.54 ; -2307,-559.54 -1674,-559.54
  lines w15: 981.84,-757 1520,-757 1520,-318 1280,-318 ; 981.84,-557 1405,-557 1405,-453 1280,-453 ; 1025,-658 1470,-658 1470,-383 1280,-383
  text "SWDIO" at -2224,973 h70 r270
  text "GND" at -2112,973 h70 r270
  text "SWCLK" at -2017,973 h70 r270
  text "5V" at -1778,815 h70 r90
  text "无线数据采集系统V3.1" at 2412,78 h140 r270
  text "Designed By YYH&CZ" at 2576,78 h140 r270
  text "注意：" at 708,-275 h70
  text "GND" at 1226,-331 h70
  text "电压模拟量输入范围为0-5V" at 708,-346.22 h70
  text "3V3" at 1224,-399 h70
  text "电流模拟量需要加电阻" at 707.94,-408.2 h70
  text "脉冲响应极限频率10KHz" at 708,-470 h70
  text "5V" at 1217,-470 h70
  text "13" at -1556,-577 h70 r270
  text "1" at -68,-578 h70 r270
  text "CAN-H" at -1475,-582.06 h70 r270
  text "CAN-L" at -1366.44,-582.06 h70 r270
  text "悬架行程-左前" at -1252.73,-582 h70 r270
  text "悬架行程-左后" at -1144.17,-582 h70 r270
  text "悬架行程-右后" at -1035.61,-582 h70 r270
  text "悬架行程-右前" at -927.05,-582 h70 r270
  text "电压模拟量输入1" at -818.37,-582 h70 r270
  text "电压模拟量输入2" at -709.81,-582 h70 r270
  text "电压模拟量输入3" at -601.25,-582 h70 r270
  text "电压模拟量输入4" at -492.68,-582 h70 r270
  text "电流模拟量输入1" at -384.12,-582 h70 r270
  text "电流模拟量输入2" at -275.56,-582 h70 r270
  text "电流模拟量输入3" at -167,-582 h70 r270
  text "U+" at -2296,-745 h70 r90
  text "U-" at -2058,-750 h70 r90
  text "脉冲输入0" at -1396,-870 h70 r90
  text "脉冲输入1" at -1286.73,-870 h70 r90
  text "脉冲输入2" at -1177.47,-870 h70 r90
  text "脉冲输入3" at -1068.2,-870 h70 r90
  text "PWM0" at -961.62,-869.94 h70 r90
  text "PWM1" at -852.18,-869.94 h70 r90
  text "PWM2" at -743.09,-869.94 h70 r90
  text "PWM3" at -633.82,-869.94 h70 r90
  text "I/O1" at -521.8,-869.94 h70 r90
  text "I/O2" at -412.53,-869.94 h70 r90
  text "I/O3" at -303.27,-869.94 h70 r90
  text "I/O4" at -194,-869.94 h70 r90
  text "14" at -95,-878 h70 r90
  text "25" at -1510,-884 h70 r90
Mechanical 1:
  circle w0.5: c106314.18,64648.71 r61.02
  circle w0.5: c106314.18,67499.87 r61.02
  circle w0.5: c111270.86,64648.71 r61.02
  circle w0.5: c111270.86,67499.87 r61.02
  lines w0.5: 106115.35,66074.29 111469.69,66074.29 ; 106587.79,64449.88 106587.79,64945.94 ; 107690.16,67389.12 107690.16,67698.7 ; 108792.52,64449.88 108792.52,67698.7 ; 109894.88,67389.12 109894.88,67698.7 ; 106115.35,64843.58 ccw(c106509.05,64843.58) 106509.05,64449.88 110406.69,64449.88 110406.69,64804.21 110741.34,64804.21 111075.99,64804.21 111075.99,64449.88 ccw(c111075.99,64843.58) 111469.69,64843.58 111469.69,67305 ccw(c111075.99,67305) 111075.99,67698.7 106509.05,67698.7 ccw(c106509.05,67305) 106115.35,67305 106115.35,64843.58 ; 106723.62,64371.14 106723.62,64945.94 108814.17,64945.94 108814.17,64371.14 106723.62,64371.14 ; 106857.48,67513.66 107172.44,67513.66 107172.44,67710.51 106857.48,67710.51 106857.48,67513.66 ; 106892.52,64967.79 106892.52,67180.78 110692.52,67180.78 110692.52,64967.79 106892.52,64967.79 ; 108233.46,66616.02 108233.46,67757.75 109351.57,67757.75 109351.57,66616.02 108233.46,66616.02 ; 109131.1,64371.14 109131.1,64945.94 110343.7,64945.94 110343.7,64371.14 109131.1,64371.14 ; 110412.6,67513.66 110412.6,67710.51 110727.56,67710.51 110727.56,67513.66 110412.6,67513.66
  text "洋红色为keepout层，蓝色为有机玻璃覆盖层（即这一部分封盒以后也是可以被看到的，防串口，swd和呼吸灯，黑色为对外的接插件，应严格遵守在图中的尺寸）" at 112343.3,67244.1 h50

## Text inside footprints (layer, text, board x,y; h text height)
nRF1: Top Overlay "NO COPPER" at 982,1625 h70
Signal1: Top Overlay "1" at -142.95,-528.12 h50 r180; Top Overlay "13" at -1412.91,-528.12 h50 r180; Top Overlay "14" at -162.85,-902.13 h50 r180; Top Overlay "25" at -1353.64,-902.13 h50 r180